# Altium PCB 02_UNROUTED_REFINED_PLACEMENT.PcbDoc (part 2 of 5)
Units mil, origin at the board's own origin, x right, y up, seen from the top; angles counter-clockwise.
Board outline 3149.61 x 1771.65 mil, 4 copper layers (L1 TOP, L2 GND, L3 POWER SIGNAL, L4 BOTTOM GND), stack 45.835 mil thick; 209 components, 132 nets, 761 pads, 5 vias.
Unrouted connection lines stored in the file: 548.
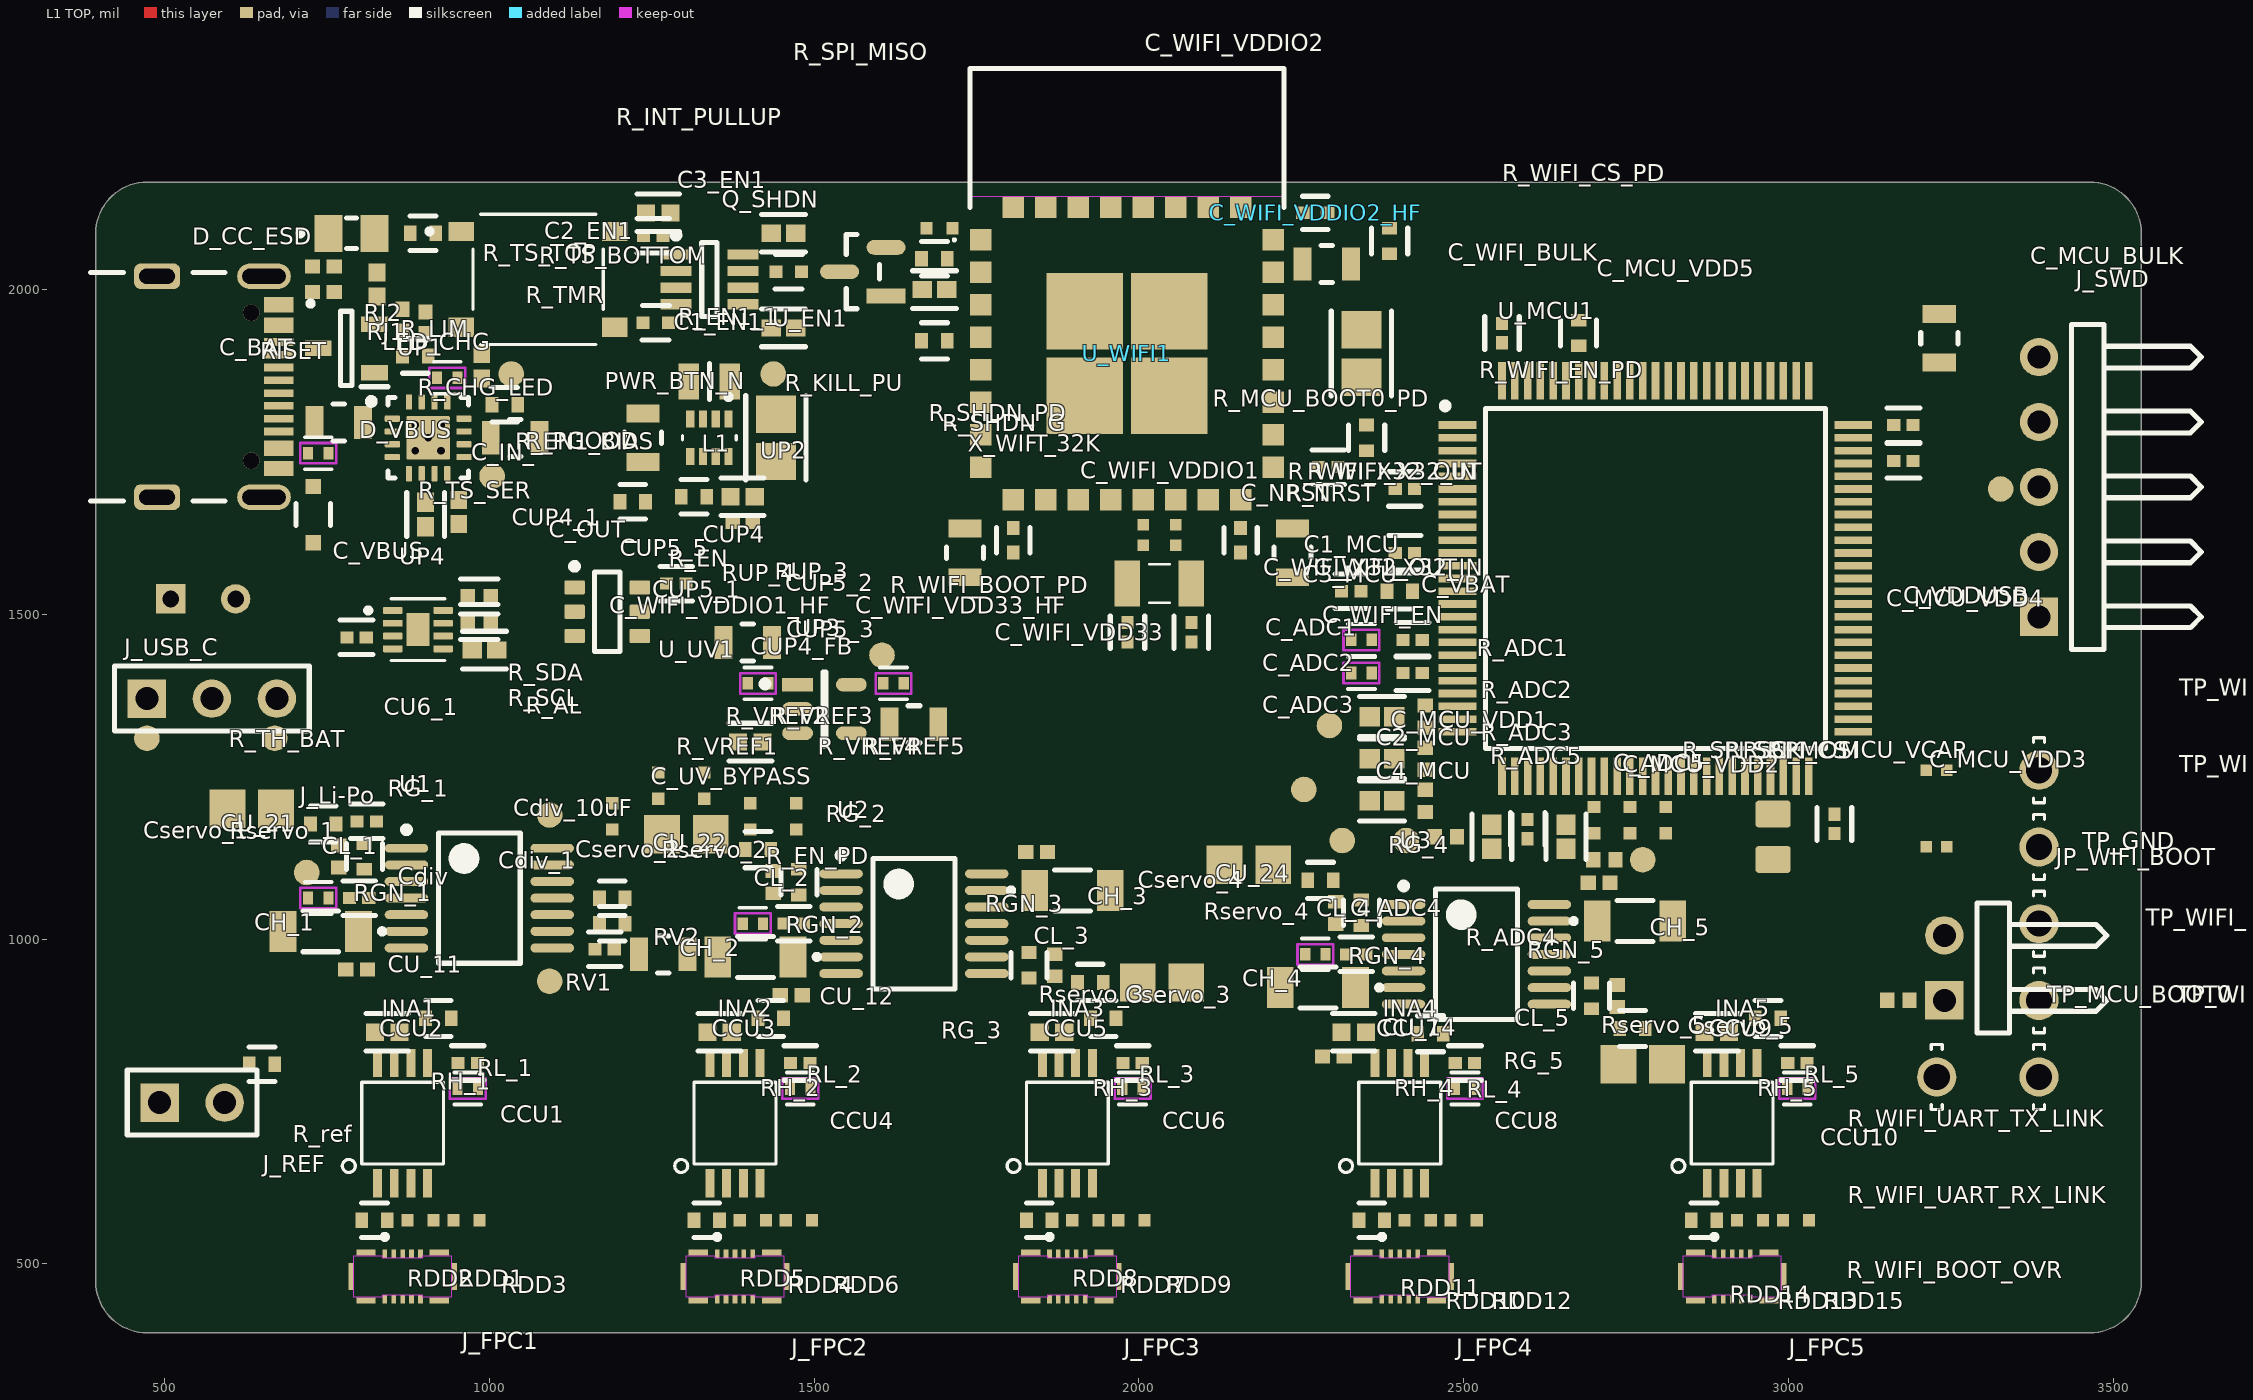
[diagram p0: L1 TOP view]

## Part data (continued)
C_MCU_VDD5: library part EMG_R5_C_MCU_VDD5, "CAP CER 0.1UF 16V X5R 0402", Capacitance=100nF, Case Code (Imperial)=0402, Case Code (Metric)=1005, Dielectric=X5R, Max Operating Temperature=85°C, Min Operating Temperature=-55°C, Package Quantity=1, Tolerance=10%, Voltage=16V, Case/Package=0402, Construction=Flat, Controlled Revision="R5 2026-09-16; project-local frozen symbol/footprint", Depth=0.5mm, Height=0.5mm, Lead Free="Lead Free", Length=1mm, Mount="Surface Mount", Packaging="Tape and Reel", Radiation Hardening=No, REACH SVHC="No SVHC", RoHS Compliant=Yes, Series=GRM, Size=0.5mm, Termination=SMD/SMT, Thickness=0.022inch, Voltage Rating=16V, Voltage Rating (DC)=16V, Width=0.02inch
C_NRST: library part EMG_R5_C_NRST, "CAP CER 0.1UF 16V X5R 0402", Capacitance=100nF, Case Code (Imperial)=0402, Case Code (Metric)=1005, Dielectric=X5R, Max Operating Temperature=85°C, Min Operating Temperature=-55°C, Package Quantity=1, Tolerance=10%, Voltage=16V, Case/Package=0402, Construction=Flat, Controlled Revision="R5 2026-09-16; project-local frozen symbol/footprint", Depth=0.5mm, Height=0.5mm, Lead Free="Lead Free", Length=1mm, Mount="Surface Mount", Packaging="Tape and Reel", Radiation Hardening=No, REACH SVHC="No SVHC", RoHS Compliant=Yes, Series=GRM, Size=0.5mm, Termination=SMD/SMT, Thickness=0.022inch, Voltage Rating=16V, Voltage Rating (DC)=16V, Width=0.02inch
C_OUT_: library part EMG_R5_C_OUT_, "10 µF ±10% 25V Ceramic Capacitor X7S 0805 (2012 Metric)", Controlled Revision="R5 2026-09-16; project-local frozen symbol/footprint"
C_UV_BYPASS: library part EMG_R5_C_UV_BYPASS, "CAP CER 0.1UF 16V X5R 0402", Capacitance=100nF, Case Code (Imperial)=0402, Case Code (Metric)=1005, Dielectric=X5R, Max Operating Temperature=85°C, Min Operating Temperature=-55°C, Package Quantity=1, Tolerance=10%, Voltage=16V, Case/Package=0402, Construction=Flat, Controlled Revision="R5 2026-09-16; project-local frozen symbol/footprint", Depth=0.5mm, Height=0.5mm, Lead Free="Lead Free", Length=1mm, Mount="Surface Mount", Packaging="Tape and Reel", Radiation Hardening=No, REACH SVHC="No SVHC", RoHS Compliant=Yes, Series=GRM, Size=0.5mm, Termination=SMD/SMT, Thickness=0.022inch, Voltage Rating=16V, Voltage Rating (DC)=16V, Width=0.02inch
C_VBAT: library part EMG_R5_C_VBAT, "CAP CER 0.1UF 16V X5R 0402", Capacitance=100nF, Case Code (Imperial)=0402, Case Code (Metric)=1005, Dielectric=X5R, Max Operating Temperature=85°C, Min Operating Temperature=-55°C, Package Quantity=1, Tolerance=10%, Voltage=16V, Case/Package=0402, Construction=Flat, Controlled Revision="R5 2026-09-16; project-local frozen symbol/footprint", Depth=0.5mm, Height=0.5mm, Lead Free="Lead Free", Length=1mm, Mount="Surface Mount", Packaging="Tape and Reel", Radiation Hardening=No, REACH SVHC="No SVHC", RoHS Compliant=Yes, Series=GRM, Size=0.5mm, Termination=SMD/SMT, Thickness=0.022inch, Voltage Rating=16V, Voltage Rating (DC)=16V, Width=0.02inch
C_VBUS: library part EMG_R5_C_VBUS, "Murata GRM155C71C105KE11D: 1 uF 16 V X7S +/-10%, 0402/1005 metric", Capacitance="1 uF", Dielectric=X7S, Manufacturer=Murata, Package="0402 / 1005 metric", Tolerance=+/-10%, Voltage Rating="16 V", Check_prices=https://www.snapeda.com/parts/GRM155C71C105KE11D/Murata/view-part/?ref=eda, Controlled Revision="R5 2026-09-16; project-local frozen symbol/footprint", Manufacturer Part Number=GRM155C71C105KE11D, MF=Murata, MP=GRM155C71C105KE11D, SnapEDA_Link=https://www.snapeda.com/parts/GRM155C71C105KE11D/Murata/view-part/?ref=snap
C_VDDUSB: library part EMG_R5_C_VDDUSB, "CAP CER 0.1UF 16V X5R 0402", Capacitance=100nF, Case Code (Imperial)=0402, Case Code (Metric)=1005, Dielectric=X5R, Max Operating Temperature=85°C, Min Operating Temperature=-55°C, Package Quantity=1, Tolerance=10%, Voltage=16V, Case/Package=0402, Construction=Flat, Controlled Revision="R5 2026-09-16; project-local frozen symbol/footprint", Depth=0.5mm, Height=0.5mm, Lead Free="Lead Free", Length=1mm, Mount="Surface Mount", Packaging="Tape and Reel", Radiation Hardening=No, REACH SVHC="No SVHC", RoHS Compliant=Yes, Series=GRM, Size=0.5mm, Termination=SMD/SMT, Thickness=0.022inch, Voltage Rating=16V, Voltage Rating (DC)=16V, Width=0.02inch
C_WIFI_BULK: library part EMG_R5_C_WIFI_BULK, "Chip Multilayer Ceramic Capacitors for General Purpose, 0805, 47uF, X5R, 15%, 20%, 6.3V", Capacitance=47uF, Case Code (Imperial)=0805, Case Code (Metric)=2012, Max Operating Temperature=85°C, Min Operating Temperature=-55°C, Tolerance=20%, Voltage Rating=6.3V, Assembly PROTO_1="Not Fitted", Assembly PROTO_1_REMOTE_NTC="Not Fitted", Case/Package=0805, Controlled Revision="R5 2026-09-16; project-local frozen symbol/footprint", Length=0.079inch, Mount="Surface Mount", Packaging="Tape and Reel", Release Note="Optional 47 uF radio bulk; retained footprint, initial prototype DNP", Thickness=0.037inch, Width=0.049inch
C_WIFI_EN: library part EMG_R5_C_WIFI_EN, "CAP CER 0.1UF 16V X5R 0402", Capacitance=100nF, Case Code (Imperial)=0402, Case Code (Metric)=1005, Dielectric=X5R, Max Operating Temperature=85°C, Min Operating Temperature=-55°C, Package Quantity=1, Tolerance=10%, Voltage=16V, Case/Package=0402, Construction=Flat, Controlled Revision="R5 2026-09-16; project-local frozen symbol/footprint", Depth=0.5mm, Height=0.5mm, Lead Free="Lead Free", Length=1mm, Mount="Surface Mount", Packaging="Tape and Reel", Radiation Hardening=No, REACH SVHC="No SVHC", RoHS Compliant=Yes, Series=GRM, Size=0.5mm, Termination=SMD/SMT, Thickness=0.022inch, Voltage Rating=16V, Voltage Rating (DC)=16V, Width=0.02inch
C_WIFI_VDD33: library part EMG_R5_C_WIFI_VDD33, "10 µF ±10% 25V Ceramic Capacitor X7S 0805 (2012 Metric)", Controlled Revision="R5 2026-09-16; project-local frozen symbol/footprint"
C_WIFI_VDD33_HF: library part EMG_R5_C_WIFI_VDD33_HF, "CAP CER 0.1UF 16V X5R 0402", Capacitance=100nF, Case Code (Imperial)=0402, Case Code (Metric)=1005, Dielectric=X5R, Max Operating Temperature=85°C, Min Operating Temperature=-55°C, Package Quantity=1, Tolerance=10%, Voltage=16V, Case/Package=0402, Construction=Flat, Controlled Revision="R5 2026-09-16; project-local frozen symbol/footprint", Depth=0.5mm, Height=0.5mm, Lead Free="Lead Free", Length=1mm, Mount="Surface Mount", Packaging="Tape and Reel", Radiation Hardening=No, REACH SVHC="No SVHC", RoHS Compliant=Yes, Series=GRM, Size=0.5mm, Termination=SMD/SMT, Thickness=0.022inch, Voltage Rating=16V, Voltage Rating (DC)=16V, Width=0.02inch
C_WIFI_VDDIO1: library part EMG_R5_C_WIFI_VDDIO1, "10 µF ±10% 25V Ceramic Capacitor X7S 0805 (2012 Metric)", Controlled Revision="R5 2026-09-16; project-local frozen symbol/footprint"
C_WIFI_VDDIO1_HF: library part EMG_R5_C_WIFI_VDDIO1_HF, "CAP CER 0.1UF 16V X5R 0402", Capacitance=100nF, Case Code (Imperial)=0402, Case Code (Metric)=1005, Dielectric=X5R, Max Operating Temperature=85°C, Min Operating Temperature=-55°C, Package Quantity=1, Tolerance=10%, Voltage=16V, Case/Package=0402, Construction=Flat, Controlled Revision="R5 2026-09-16; project-local frozen symbol/footprint", Depth=0.5mm, Height=0.5mm, Lead Free="Lead Free", Length=1mm, Mount="Surface Mount", Packaging="Tape and Reel", Radiation Hardening=No, REACH SVHC="No SVHC", RoHS Compliant=Yes, Series=GRM, Size=0.5mm, Termination=SMD/SMT, Thickness=0.022inch, Voltage Rating=16V, Voltage Rating (DC)=16V, Width=0.02inch
C_WIFI_VDDIO2: library part EMG_R5_C_WIFI_VDDIO2, "10 µF ±10% 25V Ceramic Capacitor X7S 0805 (2012 Metric)", Controlled Revision="R5 2026-09-16; project-local frozen symbol/footprint"
C_WIFI_VDDIO2_HF: library part EMG_R5_C_WIFI_VDDIO2_HF, "CAP CER 0.1UF 16V X5R 0402", Capacitance=100nF, Case Code (Imperial)=0402, Case Code (Metric)=1005, Dielectric=X5R, Max Operating Temperature=85°C, Min Operating Temperature=-55°C, Package Quantity=1, Tolerance=10%, Voltage=16V, Case/Package=0402, Construction=Flat, Controlled Revision="R5 2026-09-16; project-local frozen symbol/footprint", Depth=0.5mm, Height=0.5mm, Lead Free="Lead Free", Length=1mm, Mount="Surface Mount", Packaging="Tape and Reel", Radiation Hardening=No, REACH SVHC="No SVHC", RoHS Compliant=Yes, Series=GRM, Size=0.5mm, Termination=SMD/SMT, Thickness=0.022inch, Voltage Rating=16V, Voltage Rating (DC)=16V, Width=0.02inch
C_WIFI_X32_IN: library part EMG_R5_C_WIFI_X32_IN, "DNP - 32 kHz crystal tuning capacitor; no fitted value or MPN; retain 0402 footprint", Package="0402 / 1005 metric", Assembly PROTO_1="Not Fitted", Assembly PROTO_1_REMOTE_NTC="Not Fitted", Controlled Revision="R5 2026-09-16; project-local frozen symbol/footprint", Release Note="No fitted capacitance or MPN. Qualify pF tuning if required; never fit copied 100 nF."
C_WIFI_X32_OUT: library part EMG_R5_C_WIFI_X32_OUT, "DNP - 32 kHz crystal tuning capacitor; no fitted value or MPN; retain 0402 footprint", Package="0402 / 1005 metric", Assembly PROTO_1="Not Fitted", Assembly PROTO_1_REMOTE_NTC="Not Fitted", Controlled Revision="R5 2026-09-16; project-local frozen symbol/footprint", Release Note="No fitted capacitance or MPN. Qualify pF tuning if required; never fit copied 100 nF."
CCU1: library part EMG_R5_CCU1, "CAP CER 0.1UF 16V X5R 0402", Capacitance=100nF, Case Code (Imperial)=0402, Case Code (Metric)=1005, Dielectric=X5R, Max Operating Temperature=85°C, Min Operating Temperature=-55°C, Package Quantity=1, Tolerance=10%, Voltage=16V, Case/Package=0402, Construction=Flat, Controlled Revision="R5 2026-09-16; project-local frozen symbol/footprint", Depth=0.5mm, Height=0.5mm, Lead Free="Lead Free", Length=1mm, Mount="Surface Mount", Packaging="Tape and Reel", Radiation Hardening=No, REACH SVHC="No SVHC", RoHS Compliant=Yes, Series=GRM, Size=0.5mm, Termination=SMD/SMT, Thickness=0.022inch, Voltage Rating=16V, Voltage Rating (DC)=16V, Width=0.02inch
CCU2: library part EMG_R5_CCU2, "Murata GRM155C71C105KE11D: 1 uF 16 V X7S +/-10%, 0402/1005 metric", Capacitance="1 uF", Dielectric=X7S, Manufacturer=Murata, Manufacturer Part Number=GRM155C71C105KE11D, Package="0402 / 1005 metric", Tolerance=+/-10%, Voltage Rating="16 V", Check_prices=https://www.snapeda.com/parts/GRM155C71C105KE11D/Murata/view-part/?ref=eda, Controlled Revision="R5 2026-09-16; project-local frozen symbol/footprint", MF=Murata, MP=GRM155C71C105KE11D, SnapEDA_Link=https://www.snapeda.com/parts/GRM155C71C105KE11D/Murata/view-part/?ref=snap
CCU3: library part EMG_R5_CCU3, "Murata GRM155C71C105KE11D: 1 uF 16 V X7S +/-10%, 0402/1005 metric", Capacitance="1 uF", Dielectric=X7S, Manufacturer=Murata, Manufacturer Part Number=GRM155C71C105KE11D, Package="0402 / 1005 metric", Tolerance=+/-10%, Voltage Rating="16 V", Check_prices=https://www.snapeda.com/parts/GRM155C71C105KE11D/Murata/view-part/?ref=eda, Controlled Revision="R5 2026-09-16; project-local frozen symbol/footprint", MF=Murata, MP=GRM155C71C105KE11D, SnapEDA_Link=https://www.snapeda.com/parts/GRM155C71C105KE11D/Murata/view-part/?ref=snap